# Altium PCB VM52-T2.PcbDoc (part 2 of 2)
Units mm, origin at the board's own origin, x right, y up, seen from the top; angles counter-clockwise.
Board outline 156.25 x 95.25 mm, 4 copper layers (Top Layer, Internal Plane 1, Internal Plane 2, Bottom Layer), stack 0 mm thick; 194 components, 129 nets, 738 pads, 719 vias.
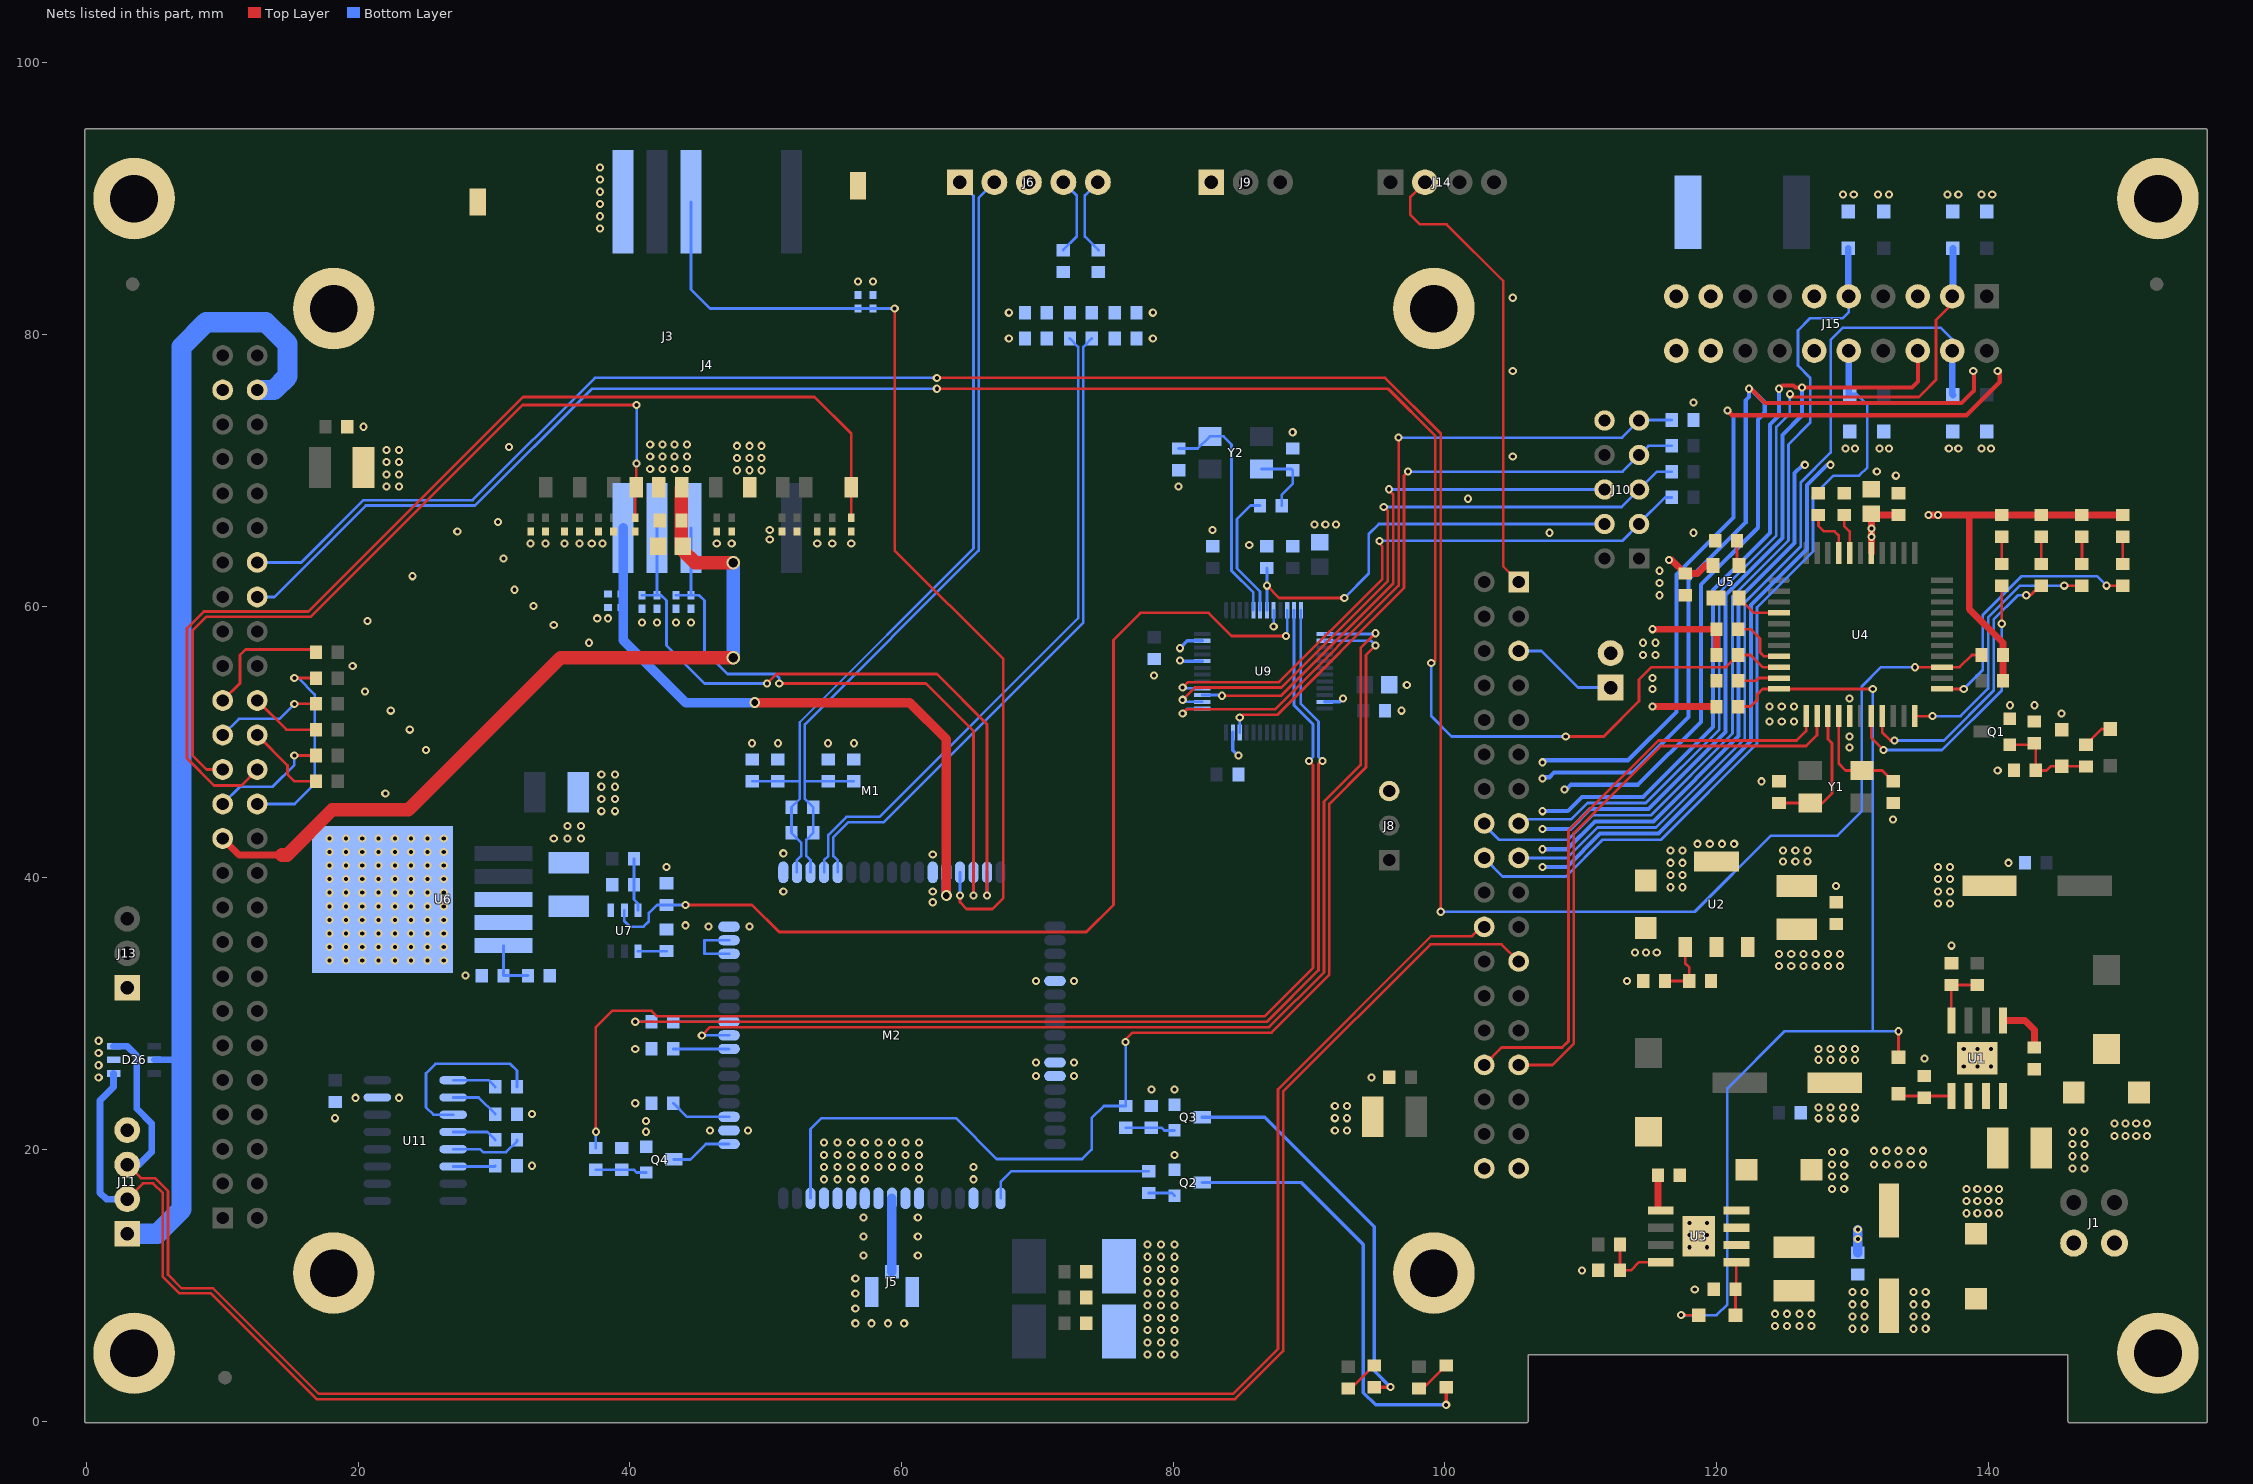
[diagram p4: the nets of this part, all layers, seen from the top]

## Via types
v1: diameter 0.6, hole 0.3, Top Layer to Bottom Layer, tented both sides, 698 vias
v2: diameter 0.8, hole 0.5, Top Layer to Bottom Layer, tented both sides, 14 vias
v3: diameter 1, hole 0.6, Top Layer to Bottom Layer, tented both sides, 5 vias
v4: diameter 1, hole 0.7, Top Layer to Bottom Layer, tented both sides, 2 vias

## Nets (pads, with @x,y where several pads share a name; then routed paths per layer and width w, separated by ;. In a path a pad name is that pad's centre, name@x,y a point inside that pad or via, vN(x,y) a via of type N, cw(c..) or ccw(c..) an arc to the next point about the centre after c; other vN are vias at no path point) (continued)
ETX_P: J14.2 M1.B1 | length 34.3
  Top Layer w0.19: J14.2@98.54,91.2 97.46,90.12 97.46,88.8 98.16,88.1 100.137,88.1 104.3,83.937 104.3,62.92 M1.B1@105.44,61.78
GND: C1.1 C2.2 C4.1 C5.1 C6.2 C7.1 C8.1 C9.2 C11.1 C12.1 C13.2 C14.1 C15.1 C16.1 C17.1 C18.2 C19.1 C20.2 C21.2 C22.2 C23.2 C24.2 C25.1 C27.2 C28.1 C29.2 C30.2 C31.1 C32.2 C33.2 C34.2 C35.2 C36.2 C37.2 C38.1 C39.1 C40.2 C43.2 C46.1 C47.1 C51.2 C52.2 C54.2 C55.2 C56.2 C57.2 C58.2 C59.2 C60.2 C61.1 C62.1 C63.1 C64.1 C65.2 C66.2 C67.2 C69.2 C71.2 C74.2 C75.2 C76.2 C77.2 D2.1 D4.1 D11.1 D14.2 D15.1 D16.1 D17.1 D18.1 D19.1 D20.1 D21.1 D22.1 D23.1 D24.1 D25.1 D26.2 D28.2 D29.2 D30.2 D31.2 D32.1 D33.1 D34.1 D35.1 J1.2 J2.2 J3. J3.3 J3.6 J4.4 J5.2 J5.3 J6.3 J8.3 J9.1 J10.10 J11.4 J13.1 J15.5 J15.6 J15.11 J15.12 M1.A49 M1.B35 M1.B36 M1.MT5 M1.MT6 M1.MT7 M1.MT8 M2.2 M2.17 M2.18 M2.29 M2.39 M2.45 M2.46 M2.54 M2.58 M2.59 M2.61 M2.62 M2.63 M2.64 M2.65 pad.MT1 pad.MT2 pad.MT3 pad.MT4 Q1.3 Q2.3 Q3.3 Q4.3 R1.2 R3.2 R4.2 R6.2 R14.2 R15.1 R17.1 R20.2 R22.1 R24.2 R25.1 R28.1 R29.1 R39.1 R44.2 R48.2 R49.1 U1.6 U1.9 U3.6 U3.9 U4.16 U5.1 U6. U6.3 U9.8 U9.23 U9.35 U9.44 U9.47 U11.15 | length 343.7
  Top Layer w0.3: v1(120.8,74.4) 121.15,74.05 138.414,74.05 140.85,76.486 140.85,77.25 140.8,77.3 v1(140.7,77.3) ; v1(122.4,76) 122.536,76 123.586,74.95 138.041,74.95 138.945,75.855 138.945,77.255 v1(138.9,77.3) ; v1(124.6,76) 124.85,76.25 125.669,76.25 125.819,76.1 v1(126.3,76.1) 134.4,76.1 134.82,76.52 J15.6@134.82,78.8
  Bottom Layer w0.2: v1(87.4,58.5) U9.8@87.4,59.7
  Bottom Layer w0.254: v1(80.5,56) 80.55,55.95 U9.44@82.15,55.95 ; v1(80.5,56.9) 81.05,57.45 U9.47@82.15,57.45 ; U9.35@84.4,50.7 84.4,49.4 v1(84.8,49) ; U9.23@91.15,52.95 92.25,52.95 v1(92.5,53.2)
  Bottom Layer w0.3: v1(107.2,40.8) 108.982,40.8 111.432,43.25 115.723,43.25 122.532,50.059 122.532,60.096 126.65,64.214 126.65,68.914 128.136,70.4 v1(128.4,70.4) ; v1(107.2,42.1) 109.009,42.1 111.059,44.15 115.35,44.15 121.632,50.432 121.632,60.532 125.75,64.65 125.75,69.8 126.35,70.4 v1(126.5,70.4) ; v1(107.2,43.6) 109.236,43.6 110.686,45.05 114.978,45.05 120.655,50.727 120.655,60.827 124.85,65.022 124.85,72.6 126.3,74.05 v1(126.3,76.1) ; v1(107.2,44.9) 109.05,44.9 110.1,45.95 114.605,45.95 119.755,51.1 119.755,61.2 123.95,65.395 123.95,73.377 124.6,74.027 v1(124.6,76) ; v1(107.2,47.3) 107.2,47.4 107.7,47.4 108.05,47.75 113.859,47.75 117.95,51.841 117.95,61.9 117.955,61.905 117.955,61.945 122.15,66.141 122.15,75.15 122.4,75.4 v1(122.4,76) 122.519,76 123.55,74.969 123.55,74.25 123.05,73.75 123.05,65.768 118.855,61.573 118.855,51.473 114.232,46.85 109.3,46.85 108.95,46.5 v1(108.8,46.5) ; v1(107.2,48.5) 107.2,48.65 113.486,48.65 117.05,52.214 117.05,62.314 121.25,66.514 121.25,73.95 v1(120.8,74.4) ; J15.12@127.2,78.8 J15.12@127.35,78.65
  other v1: 78.1,4.9 79.1,4.9 80.1,4.9 78.1,5.8 79.1,5.8 80.1,5.8 78.1,6.7 79.1,6.7 80.1,6.7 130,6.8 130.9,6.8 134.5,6.8 135.4,6.8 124.3,7 125.2,7 126.1,7 127,7 56.6,7.2 57.8,7.2 59,7.2 60.2,7.2 78.1,7.6 79.1,7.6 80.1,7.6 130,7.7 130.9,7.7 134.5,7.7 135.4,7.7 124.3,7.9 125.2,7.9 126.1,7.9 127,7.9 56.6,8.3 78.1,8.5 79.1,8.5 80.1,8.5 130,8.6 130.9,8.6 134.5,8.6 135.4,8.6 56.6,9.4 78.1,9.4 79.1,9.4 80.1,9.4 130,9.5 130.9,9.5 134.5,9.5 135.4,9.5 118.4,9.7 78.1,10.3 79.1,10.3 80.1,10.3 56.6,10.5 110.1,11.1 78.1,11.2 79.1,11.2 80.1,11.2 78.1,12.1 79.1,12.1 80.1,12.1 57.2,12.2 61.2,12.2 118,12.8 119.3,12.8 78.1,13 79.1,13 80.1,13 57.2,13.6 61.2,13.6 118,13.7 119.3,13.7 118,14.6 119.3,14.6 57.2,15 61.2,15 128.5,17.1 129.4,17.1 54.3,17.8 55.3,17.8 56.3,17.8 57.3,17.8 61.3,17.8 65.3,17.8 128.5,18 129.4,18 146.2,18.6 147.1,18.6 54.3,18.7 55.3,18.7 56.3,18.7 57.3,18.7 58.3,18.7 59.3,18.7 60.3,18.7 61.3,18.7 65.3,18.7 32.8,18.8 128.5,18.9 129.4,18.9 146.2,19.5 147.1,19.5 54.3,19.6 55.3,19.6 56.3,19.6 57.3,19.6 58.3,19.6 59.3,19.6 60.3,19.6 61.3,19.6 80.1,19.6 128.5,19.8 129.4,19.8 146.2,20.4 147.1,20.4 54.3,20.5 55.3,20.5 56.3,20.5 57.3,20.5 58.3,20.5 59.3,20.5 60.3,20.5 61.3,20.5 149.3,21 150.1,21 150.9,21 151.7,21 41.2,21.3 146.2,21.3 147.1,21.3 45.9,21.4 48.7,21.4 91.9,21.4 92.8,21.4 149.3,21.9 150.1,21.9 150.9,21.9 151.7,21.9 41.2,22.1 18.3,22.3 91.9,22.3 92.8,22.3 127.5,22.3 128.4,22.3 129.3,22.3 130.2,22.3 32.8,22.6 127.5,23.1 128.4,23.1 129.3,23.1 130.2,23.1 91.9,23.2 92.8,23.2 40.4,23.4 19.8,23.8 23,23.8 78.4,24.4 80.1,24.4 0.9,25.3 94.6,25.3 69.9,25.4 72.7,25.4 138.2,26.1 139.2,26.1 140.2,26.1 0.9,26.2 69.9,26.4 72.7,26.4 127.5,26.6 128.4,26.6 129.3,26.6 130.2,26.6 135.3,26.7 0.9,27.1 40.4,27.4 127.5,27.4 128.4,27.4 129.3,27.4 130.2,27.4 138.2,27.4 139.2,27.4 140.2,27.4 0.9,28 69.9,32.4 72.7,32.4 113.4,32.4 27.9,32.8 17.9,33.9 19.1,33.9 20.3,33.9 21.5,33.9 22.7,33.9 23.9,33.9 25.1,33.9 26.3,33.9 114,34.5 114.8,34.5 115.6,34.5 17.9,34.9 19.1,34.9 20.3,34.9 21.5,34.9 22.7,34.9 23.9,34.9 25.1,34.9 26.3,34.9 137.3,35 17.9,35.9 19.1,35.9 20.3,35.9 21.5,35.9 22.7,35.9 23.9,35.9 25.1,35.9 26.3,35.9 45.8,36.4 48.8,36.4 44.1,36.5 17.9,36.9 19.1,36.9 20.3,36.9 21.5,36.9 22.7,36.9 23.9,36.9 25.1,36.9 26.3,36.9 17.9,37.9 19.1,37.9 20.3,37.9 21.5,37.9 22.7,37.9 23.9,37.9 25.1,37.9 26.3,37.9 136.3,38.1 137.2,38.1 62.3,38.2 17.9,38.9 19.1,38.9 20.3,38.9 21.5,38.9 22.7,38.9 23.9,38.9 25.1,38.9 26.3,38.9 51.3,39 62.3,39 136.3,39 137.2,39 128.8,39.4 17.9,39.9 19.1,39.9 20.3,39.9 21.5,39.9 22.7,39.9 23.9,39.9 25.1,39.9 26.3,39.9 136.3,39.9 137.2,39.9 42.7,40.8 136.3,40.8 137.2,40.8 17.9,40.9 19.1,40.9 20.3,40.9 21.5,40.9 22.7,40.9 23.9,40.9 25.1,40.9 26.3,40.9 141.5,41.1 124.9,41.2 125.8,41.2 126.7,41.2 62.3,41.7 51.3,41.8 17.9,41.9 19.1,41.9 20.3,41.9 21.5,41.9 22.7,41.9 23.9,41.9 25.1,41.9 26.3,41.9 124.9,42 125.8,42 126.7,42 17.9,42.9 19.1,42.9 20.3,42.9 21.5,42.9 22.7,42.9 23.9,42.9 25.1,42.9 26.3,42.9 34.4,42.9 35.4,42.9 36.4,42.9 35.4,43.8 36.4,43.8 133,44.3 37.9,44.9 38.9,44.9 37.9,45.8 38.9,45.8 22,46.2 37.9,46.7 38.9,46.7 123.3,47.1 37.9,47.6 38.9,47.6 140.7,47.9 25,49.4 129.8,49.6 49,49.9 50.9,49.9 54.6,49.9 56.5,49.9 129.8,50.4 23.8,50.9 123.9,51.5 124.8,51.5 125.7,51.5 145.4,52.1 22.4,52.3 96.8,52.3 123.9,52.6 124.8,52.6 125.7,52.6 141.6,52.7 143.4,52.7 129.8,53.2 20.5,53.7 115.3,53.9 97.2,54.2 115.3,54.7 78.6,54.9 19.6,55.6 114.6,56.4 115.5,56.4 37,57.3 114.6,57.3 115.5,57.3 34.4,58.6 40.9,58.8 42,58.8 43.4,58.8 44.5,58.8 20.7,58.9 37.6,59.1 38.4,59.1 32.9,60 115.8,60.8 31.5,61.2 115.8,61.7 24,62.2 115.8,62.6 30.7,63.5 85.6,64.5 32.7,64.6 33.8,64.6 35.2,64.6 36.3,64.6 37.2,64.6 38,64.6 46.4,64.6 47.5,64.6 53.8,64.6 54.9,64.6 56.3,64.6 50.3,64.9 107.7,65.4 118.3,65.4 27.3,65.5 50.3,65.6 82.9,65.6 90.4,66 91.2,66 92,66 30.3,66.2 101.7,67.9 22.1,68.8 23,68.8 80.4,68.8 133.2,69.6 22.1,69.7 23,69.7 131.8,69.9 47.9,70 48.8,70 49.7,70 41.5,70.1 42.4,70.1 43.3,70.1 44.2,70.1 22.1,70.6 23,70.6 47.9,70.9 48.8,70.9 49.7,70.9 41.5,71 42.4,71 43.3,71 44.2,71 105,71 22.1,71.5 23,71.5 129.5,71.6 130.2,71.6 132,71.6 132.7,71.6 137.1,71.6 137.8,71.6 139.5,71.6 140.2,71.6 31.1,71.7 47.9,71.8 48.8,71.8 49.7,71.8 41.5,71.9 42.4,71.9 43.3,71.9 44.2,71.9 88.8,72.8 20.4,73.2 118.3,75 105,77.3 67.9,79.7 78.5,79.7 67.9,81.6 78.5,81.6 105,82.7 56.8,83.9 57.9,83.9 37.8,87.8 37.8,88.7 37.8,89.6 129.3,90.3 130.1,90.3 131.9,90.3 132.7,90.3 137,90.3 137.8,90.3 139.5,90.3 140.3,90.3 37.8,90.5 37.8,91.4 37.8,92.3
GSM-PK: R38.2 U9.11 | length 91
  Top Layer w0.2: v1(37.5,21.3) 37.5,29 38.7,30.2 41.6,30.2 42,29.8 86.734,29.8 90.3,33.366 90.3,48.3 v1(90,48.6)
  Bottom Layer w0.2: R38.2@37.5,20.1 v1(37.5,21.3) ; U9.11@88.9,59.7 88.9,52.7 90.3,51.3 90.3,48.9 v1(90,48.6)
GSM-PWR: R25.2 U7.5 U9.10 | length 75.3
  Top Layer w0.2: v1(44.1,38) 49,38 51,36 73.6,36 75.6,38 75.6,57.5 77.6,59.5 82.6,59.5 84.3,57.8 v1(88.3,57.8)
  Bottom Layer w0.2: U7.5@39.6,37.6 39.6,36.8 40,36.4 41,36.4 41.4,36.8 41.4,37.4 42,38 R25.2@42.7,38 v1(44.1,38) ; v1(88.3,57.8) 88.4,57.9 U9.10@88.4,59.7
GSM-RXD: R33.1 U9.12 | length 80.4
  Top Layer w0.2: v1(40.4,29.4) 86.9,29.4 90.7,33.2 90.7,48.4 90.9,48.6 v1(91,48.6)
  Bottom Layer w0.2: v1(40.4,29.4) R33.1@41.6,29.4 ; U9.12@89.4,59.7 89.4,52.8 90.7,51.5 90.7,48.9 v1(91,48.6)
GSM-TXD: M2.9 U9.13 | length 80
  Top Layer w0.2: v1(45.3,28.4) 45.9,29 87.066,29 91.1,33.034 91.1,45.6 93.8,48.3 93.8,56.9 v1(94.9,58)
  Bottom Layer w0.2: v1(45.3,28.4) M2.9@47.3,28.4 ; U9.13@91.15,57.95 94.85,57.95 v1(94.9,58)
HAND-IN: M1.A38 R12.2 U4.9 | length 145.3
  Top Layer w0.2: v1(62.6,76) 95.834,76 99.3,72.534 99.3,56 99.1,55.8 v1(99,55.8) ; v1(108.9,50.4) 111.7,50.4 114.3,53 114.3,54.6 115.2,55.5 120.7,55.5 R12.2@121.6,56.4 122.5,56.4 123.4,55.5 U4.9@124.6,55.5
  Bottom Layer w0.2: M1.A38@12.57,60.67 13.836,60.67 20.566,67.4 28.6,67.4 37.2,76 v1(62.6,76) ; v1(99,55.8) 99,51.9 100.5,50.4 v1(108.9,50.4)
HAND-OUT: M1.A40 R11.2 U4.25 | length 182.7
  Top Layer w0.2: v1(62.6,76.8) 95.6,76.8 99.7,72.7 v1(99.7,37.5) ; v1(134.6,55.5) U4.25@136.6,55.5 137.9,55.5 138.8,56.4 R11.2@139.5,56.4
  Bottom Layer w0.2: M1.A40@12.57,63.21 15.81,63.21 20.4,67.8 28.434,67.8 37.434,76.8 v1(62.6,76.8) ; v1(99.7,37.5) 118.4,37.5 124,43.1 128.9,43.1 130.7,44.9 130.7,54.1 132.1,55.5 v1(134.6,55.5)
HDD-LOCK: R14.1 U4.10 | length 3.1
  Top Layer w0.2: R14.1@121.6,54.5 122.9,54.5 123.1,54.7 U4.10@124.6,54.7
I2C-SCL: M1.B29 U4.13 | length 42.5
  Top Layer w0.2: M1.B29@105.44,26.22 107.92,26.22 109.5,27.8 109.5,43.3 115.9,49.7 126.6,49.7 127.4,50.5 U4.13@127.4,51.9
I2C-SDA: M1.B30 U4.12 | length 44.1
  Top Layer w0.2: M1.B30@102.9,26.22 104.18,27.5 108.634,27.5 109.1,27.966 109.1,43.466 115.734,50.1 125.9,50.1 126.6,50.8 U4.12@126.6,51.9
IR: R16.1 U4.8 | length 4.4
  Top Layer w0.2: R16.1@121.6,58.3 122.5,58.3 123.2,57.6 123.2,56.6 123.5,56.3 U4.8@124.6,56.3
MIC_N: C40.1 C41.2 C42.2 C43.1 J6.2 M2.20 | length 60.8
  Bottom Layer w0.19: M2.20@53.3,40.4 53.3,41.295 52.99,41.605 52.99,42.79 C42.2@53.5,43.3 C41.2@53.5,45.2 52.89,45.81 52.89,47.1 ; C43.1@56.5,47.1 C40.1@54.6,47.1 52.89,47.1 ; J6.2@66.84,91.2 65.68,90.04 65.68,64.08 52.89,51.29 52.89,47.1
MIC_P: C38.2 C39.2 C41.1 C42.1 J6.1 M2.19 | length 60.7
  Bottom Layer w0.19: C39.2@49,47.1 C38.2@50.9,47.1 52.51,47.1 ; M2.19@52.3,40.4 52.3,41.295 52.61,41.605 52.61,42.59 C42.1@51.9,43.3 C41.1@51.9,45.2 52.51,45.81 52.51,47.1 ; J6.1@64.3,91.2 65.3,90.2 65.3,64.237 52.51,51.447 52.51,47.1
NetC3_1: C3.1 D2.2 L1.1 U1.8
NetC3_2: C3.2 U1.1 | length 3.9
  Top Layer w0.5: U1.1@141.1,29.5 142.7,29.5 143.4,28.8 C3.2@143.4,27.5
NetC10_1: C10.1 D4.2 L2.1 U3.8
NetC10_2: C10.2 U3.1 | length 2.4
  Top Layer w0.5: U3.1@115.7,15.7 C10.2@115.7,18.1
NetC18_1: C18.1 D11.2 Q1.2 R19.1 R20.1 | length 7.7
  Top Layer w0.2: Q1.2@141.6,49.8 143.3,49.8 C18.1@143.4,49.9 143.5,49.8 R20.1@143.5,47.9 144.3,47.9 144.6,48.2 D11.2@145.4,48.2 R19.1@147.2,48.2
NetC20_1: C20.1 U5.3 | length 1.9
  Top Layer w0.2: C20.1@121.5,64.8 121.5,63.15 U5.3@121.65,63
NetC26_2: C26.2 R21.2 U7.6 | length 3.9
  Bottom Layer w0.2: C26.2@40.3,41.4 40.3,38.4 40.6,38.1 U7.6@40.6,37.6
NetC31_2: C31.2 R21.1 R23.2 U6.4 U7.4
NetC45_2: C45.2 J6.4 | length 5.8
  Bottom Layer w0.2: C45.2@71.9,86.2 72.9,87.2 72.9,90.22 J6.4@71.92,91.2
NetC53_2: C53.2 J6.5 | length 5.8
  Bottom Layer w0.2: J6.5@74.46,91.2 73.5,90.24 73.5,87.2 C53.2@74.5,86.2
NetC63_2: C63.2 R40.2 Y2.1 | length 5.3
  Bottom Layer w0.2: Y2.1@86.5,70.1 88.7,70.1 C63.2@88.8,70 88.8,69 88,68.2 R40.2@88,67.4
NetC68_1: C68.1 U11.1 | length 3.3
  Bottom Layer w0.2: U11.1@27,25.1 29.6,25.1 C68.1@30.1,24.6
NetC68_2: C68.2 U11.3 | length 13.1
  Bottom Layer w0.2: U11.3@27,22.56 25.54,22.56 25,23.1 25,25.6 25.7,26.3 31.2,26.3 31.7,25.8 C68.2@31.7,24.6
NetC69_1: C69.1 U11.2 | length 3.6
  Bottom Layer w0.2: U11.2@27,23.83 28.87,23.83 C69.1@30.1,22.6
NetC70_1: C70.1 U11.4 | length 3.3
  Bottom Layer w0.2: U11.4@27,21.29 29.51,21.29 C70.1@30.1,20.7
NetC70_2: C70.2 U11.5 | length 5.2
  Bottom Layer w0.2: U11.5@27,20.02 28.98,20.02 29.2,19.8 30.9,19.8 31.7,20.6 C70.2@31.7,20.7
NetC71_1: C71.1 U11.6 | length 3.1
  Bottom Layer w0.2: U11.6@27,18.75 30.05,18.75 C71.1@30.1,18.8
NetD1_1: D1.1 J1.1
NetD3_2: D3.2 R3.1 U1.5 | length 4
  Top Layer w0.2: D3.2@133.4,24.1 133.56,23.94 U1.5@137.29,23.94
NetD5_2: D5.2 R6.1 U3.5 | length 3.9
  Top Layer w0.2: D5.2@121.4,7.8 R6.1@121.4,9.7 121.46,9.76 U3.5@121.46,11.69
NetD6_1: D6.1 R7.2 | length 2
  Top Layer w0.2: D6.1@141,63.1 R7.2@141,65.1
NetD7_1: D7.1 R8.2 | length 2
  Top Layer w0.2: D7.1@143.9,63.1 R8.2@143.9,65.1
NetD8_1: D8.1 R9.2 | length 2
  Top Layer w0.2: D8.1@146.9,63.1 R9.2@146.9,65.1
NetD9_1: D9.1 R10.2 | length 2
  Top Layer w0.2: D9.1@149.9,63.1 R10.2@149.9,65.1
NetD10_2: D10.2 R19.2 | length 2.3
  Top Layer w0.2: R19.2@147.2,49.8 148.35,50.95 D10.2@149,50.95
NetD12_1: D12.1 R26.2 | length 2.7
  Top Layer w0.2: R26.2@98.1,2.4 98.4,2.4 D12.1@100.1,4.1
NetD12_2: D12.2 Q2.1 | length 32.4
  Top Layer w0.254: v1(100.1,1.2) D12.2@100.1,2.5
  Bottom Layer w0.254: Q2.1@82.132,17.565 89.435,17.565 94,13 94,2.1 94.9,1.2 v1(100.1,1.2)
NetD13_1: D13.1 R30.2 | length 2.6
  Top Layer w0.2: R30.2@92.9,2.4 93.1,2.4 D13.1@94.8,4.1
NetD13_2: D13.2 Q3.1 | length 29.5
  Top Layer w0.254: D13.2@94.8,2.5 v1(96,2.5)
  Bottom Layer w0.254: Q3.1@82.132,22.365 86.735,22.365 94.8,14.3 94.8,3.7 v1(96,2.5)
NetF1_2: F1.2 J15.17 J15.18 J15.19 J15.20
NetM2_3: M2.3 R28.2 | length 4.5
  Bottom Layer w0.2: R28.2@43.2,23.4 44.2,22.4 M2.3@47.3,22.4
NetM2_8: M2.8 R29.2 | length 4.1
  Bottom Layer w0.2: R29.2@43.2,27.4 M2.8@47.3,27.4
NetM2_10: M2.10 R33.2 | length 4.1
  Bottom Layer w0.2: R33.2@43.2,29.4 M2.10@47.3,29.4
NetM2_15: M2.15 M2.16 | length 4.6
  Bottom Layer w0.2: M2.15@47.3,34.4 45.5,34.4 45.5,35.4 M2.16@47.3,35.4
NetQ2_2: Q2.2 R27.1 | length 2
  Bottom Layer w0.2: R27.1@78.2,16.8 79.9,16.8 Q2.2@80.1,16.6
NetQ3_2: Q3.2 R36.1 R49.2 | length 3.7
  Bottom Layer w0.2: R36.1@76.5,21.6 R49.2@78.4,21.6 79.15,21.6 79.35,21.4 Q3.2@80.1,21.4
NetQ4_2: Q4.2 R38.1 R39.2 | length 3.8
  Bottom Layer w0.2: R38.1@37.5,18.5 40.3,18.5 40.5,18.3 Q4.2@41.2,18.3
NetR1_1: R1.1 R2.1 U1.4 | length 4.5
  Top Layer w0.2: U1.4@137.29,29.5 137.29,32.09 R1.1@137.3,32.1 R2.1@139.2,32.1
NetR4_1: R4.1 R5.1 U3.4 | length 5.2
  Top Layer w0.2: R5.1@112.9,13 R4.1@112.9,11.1 113.7,11.1 114.3,11.7 115.89,11.7 U3.4@115.9,11.69
NetR15_2: R15.2 U4.40 | length 3
  Top Layer w0.2: R15.2@129.4,66.7 129.4,65.9 129.8,65.5 U4.40@129.8,63.9
NetR17_2: R17.2 U4.41 | length 3.9
  Top Layer w0.2: R17.2@127.5,66.7 127.5,65.9 127.9,65.5 128.7,65.5 129,65.2 U4.41@129,63.9
NetR22_2: R22.2 U7.1 | length 2.1
  Bottom Layer w0.2: U7.1@40.6,34.6 R22.2@42.7,34.6
NetR23_1: R23.1 R24.1 U6.5 | length 4
  Bottom Layer w0.2: U6.5@30.7,35 R24.1@30.7,32.8 R23.1@32.5,32.8
NetR47_2: R47.2 R48.1 U2.1 | length 4.4
  Top Layer w0.2: R48.1@116.2,32.4 R47.2@118,32.4 118,33.4 117.7,33.7 U2.1@117.7,34.9
NLIGHT: M2.52 R27.2 | length 12.4
  Bottom Layer w0.2: M2.52@67.3,16.4 67.3,17.6 68.1,18.4 R27.2@78.2,18.4
NRST: C62.2 J10.4 U9.7 | length 32.5
  Top Layer w0.2: v1@86.9,61.7 v1(86.9,61.5) 87.8,60.6 v1(92.6,60.6)
  Bottom Layer w0.2: U9.7@86.9,59.7 86.9,60.8 v1(86.9,61.5) C62.2@86.9,62.8 ; v1(92.6,60.6) 94.4,62.4 94.4,65.3 95.14,66.04 J10.4@111.76,66.04
OSC-IN: C61.2 U9.5 Y2.2 | length 17.4
  Bottom Layer w0.2: C61.2@80.4,71.6 81.8,71.6 Y2.2@82.7,72.5 83.7,72.5 84.3,71.9 84.3,62.6 85.9,61 U9.5@85.9,59.7
OSC-OUT: R40.1 U9.6 | length 9.5
  Bottom Layer w0.2: U9.6@86.4,59.7 86.4,61.066 84.7,62.766 84.7,66.4 85.7,67.4 R40.1@86.4,67.4
OTG_N: D26.1 J11.2 M1.B23 | length 150.6
  Top Layer w0.19: J11.2@3,16.87 J11.2@3,16.34 4.16,17.5 4.9,17.5 5.62,16.78 5.62,10.623 6.843,9.4 9.163,9.4 16.943,1.62 84.557,1.62 88.1,5.163 88.1,24.263 98.937,35.1 104.18,35.1 M1.B23@105.44,33.84
  Bottom Layer w0.5: D26.1@2,25.6 2,24.6 1,23.6 1,16.8 1.46,16.34 J11.2@3,16.34
OTG_P: D26.3 J11.3 M1.B22 | length 147.7
  Top Layer w0.19: J11.3@3,18.88 4,17.88 5.057,17.88 6,16.937 6,10.78 7,9.78 9.32,9.78 17.1,2 84.4,2 87.72,5.32 87.72,24.42 99,35.7 102,35.7 102.68,36.38 M1.B22@102.9,36.38
  Bottom Layer w0.19: J11.3@3,18.88 J11.3@3.88,18.88
  Bottom Layer w0.5: D26.3@2,27.6 3,27.6 3.7,26.9 3.7,25.3 3.7,23 4.8,21.9 4.8,19.8 J11.3@3.88,18.88
PWR-EN: D3.1 D5.1 R13.1 U4.11 | length 73
  Top Layer w0.2: v1(117.4,7.8) D5.1@118.7,7.8 ; R13.1@121.6,52.6 122.5,52.6 123,53.1 123,53.5 123.4,53.9 U4.11@124.6,53.9 v1(131.5,53.9) ; D3.1@133.4,26.8 v1(133.4,28.7)
  Bottom Layer w0.2: v1(117.4,7.8) 120,7.8 120.8,8.6 120.8,24.5 125,28.7 131.5,28.7 ; v1(131.5,53.9) 131.5,28.7 ; v1(133.4,28.7) 131.5,28.7
PWR-LED: D9.2 U4.23 | length 19.4
  Top Layer w0.2: U4.23@136.6,53.9 v1(138.2,53.9) ; v1(148.7,61.5) D9.2@149.9,61.5
  Bottom Layer w0.2: v1(138.2,53.9) 139.6,55.3 139.6,59.331 142.469,62.2 148,62.2 v1(148.7,61.5)
PWRKEY: M2.1 Q4.1 | length 4.5
  Bottom Layer w0.2: Q4.1@43.232,19.265 44.465,19.265 45.6,20.4 M2.1@47.3,20.4
REC-LED: D7.2 U4.19 | length 20.9
  Top Layer w0.2: U4.19@132.2,51.9 132.2,50.7 132.8,50.1 v1(133.1,50.1) ; v1(142.8,60.8) 143.1,60.8 143.8,61.5 D7.2@143.9,61.5
  Bottom Layer w0.2: v1(133.1,50.1) 136.734,50.1 140.4,53.766 140.4,59 142.2,60.8 v1(142.8,60.8)
RFANT: J5.1 M2.60 | length 5.4
  Bottom Layer w0.7: J5.1@59.3,11 M2.60@59.3,16.4
RST: U4.4 U5.2 | length 3.4
  Top Layer w0.2: U5.2@121.65,60.6 122.75,59.5 U4.4@124.6,59.5
RUN-LED: D8.2 U4.22 | length 19.3
  Top Layer w0.2: U4.22@134.6,51.9 v1(135.9,51.9) ; v1(145.6,61.5) D8.2@146.9,61.5
  Bottom Layer w0.2: v1(135.9,51.9) 137.969,51.9 140,53.931 140,59.166 142.334,61.5 v1(145.6,61.5)
SD-CARDIN: D14.1 J3.10 M1.A27 | length 59.7
  Top Layer w0.2: M1.A27@10.03,47.97 8.83,47.97 7.8,49 7.8,58.2 8.808,59.208 16.508,59.208 32.1,74.8 v1(40.5,74.8) ; D14.1@40.4,66.5 J3.10@40.4,68.68 ; J3.10@40.47,68.75 40.47,70.47 v1(40.5,70.5)
  Bottom Layer w0.2: v1(40.5,70.5) v1(40.5,74.8)
SD-CLK: M1.A31 R50.1 | length 9.7
  Top Layer w0.2: M1.A31@10.05,53.05 M1.A31@10.03,53.05 11.3,54.32 11.3,56.4 11.7,56.8 16.7,56.8 R50.1@16.9,56.6
SD-CMD: M1.A32 R46.1 | length 5.2
  Top Layer w0.2: M1.A32@12.57,53.05 14.72,50.9 R46.1@16.9,50.9
SD-DAT0: M1.A25 R51.1 | length 8.8
  Top Layer w0.2: v1(15.3,49) R51.1@16.9,49
  Bottom Layer w0.2: M1.A25@10.03,45.43 11.3,46.7 13.7,46.7 15.3,48.3 v1(15.3,49)
SD-DAT1: M1.A30 R52.1 | length 6.1
  Top Layer w0.2: M1.A30@12.57,50.51 14.8,48.28 14.8,47.6 15.3,47.1 R52.1@16.9,47.1
SD-DAT2: M1.A26 R53.1 | length 15
  Top Layer w0.2: v1(15.3,54.7) R53.1@16.9,54.7
  Bottom Layer w0.2: M1.A26@12.57,45.43 15.33,45.43 16.8,46.9 16.8,53.5 15.6,54.7 v1(15.3,54.7)
SD-DAT3: M1.A29 R45.1 | length 8
  Top Layer w0.2: M1.A29@10.03,50.51 M1.A29@10.21,50.51 ; v1(15.3,52.8) R45.1@16.9,52.8
  Bottom Layer w0.2: M1.A29@10.03,50.51 11.22,51.7 14.2,51.7 v1(15.3,52.8)
SD-LED: D6.2 U4.18 | length 21.1
  Top Layer w0.2: U4.18@131.4,51.9 131.4,50.3 v1(132.3,49.4) ; v1(141,58.7) D6.2@141,61.5
  Bottom Layer w0.2: v1(132.3,49.4) 136.6,49.4 141,53.8 v1(141,58.7)
SD-WP: D15.2 J3.11 M1.A28 | length 79.3
  Top Layer w0.2: M1.A28@12.57,47.97 11.4,46.8 9.4,46.8 7.4,48.8 7.4,58.366 8.642,59.608 16.342,59.608 32.134,75.4 53.6,75.4 56.3,72.7 J3.11@56.3,68.75 D15.2@56.3,66.5
SIMCLK: C29.1 D23.2 J4.3 M2.32 | length 47.2
  Top Layer w0.2: v1(51,54.3) 61.8,54.3 65.3,50.8 v1(65.3,38.7)
  Bottom Layer w0.2: C29.1@43.4,60.8 D23.2@44.5,60.8 ; J4.3@44.5,65.75 D23.2@44.5,60.8 ; v1(51,54.3) 51,54.7 50.7,55 47.2,55 45.5,56.7 45.5,60.4 45.1,60.8 D23.2@44.5,60.8 ; v1(65.3,38.7) M2.32@65.3,40.4
SIMDATA: C27.1 D22.2 J4.6 M2.31 | length 74.7
  Top Layer w0.2: v1(59.5,81.9) 59.5,64.1 67.5,56.1 67.5,38.5 66.7,37.7 64.8,37.7 64.3,38.2 v1(64.3,38.7)
  Bottom Layer w0.2: J4.6@44.5,89.75 44.5,83.3 45.9,81.9 C27.1@56.8,81.9 D22.2@57.9,81.9 v1(59.5,81.9) ; v1(64.3,38.7) M2.31@64.3,40.4
SIMRST: C30.1 D24.2 J4.2 M2.33 | length 51.1
  Top Layer w0.2: v1(50.1,54.3) 50.8,55 62.6,55 66.3,51.3 v1(66.3,38.7)
  Bottom Layer w0.2: C30.1@40.9,60.8 D24.2@42,60.8 ; J4.2@42,65.75 D24.2@42,60.8 ; v1(50.1,54.3) 45.5,54.3 42.7,57.1 42.7,60.4 42.3,60.8 D24.2@42,60.8 ; v1(66.3,38.7) M2.33@66.3,40.4
SIMVCC: C32.1 D25.2 J4.1 M2.30 | length 48.3
  Top Layer w0.7: v2(49.2,52.9) 60.6,52.9 63.3,50.2 v2(63.3,38.7)
  Bottom Layer w0.7: J4.1@39.5,65.75 39.5,57.5 44.1,52.9 v2(49.2,52.9) ; v2(63.3,38.7) M2.30@63.3,40.4
SPK_N: C48.2 C49.2 C51.1 C52.1 C53.1 M2.22 | length 48.8
  Bottom Layer w0.19: M2.22@55.3,40.4 55.3,41.295 54.99,41.605 54.99,42.99 56.1,44.1 58.7,44.1 73.39,58.79 73.39,79.09 C49.2@74,79.7
SPK_P: C45.1 C46.2 C47.2 C48.1 C49.1 M2.21 | length 48.7
  Bottom Layer w0.19: M2.21@54.3,40.4 54.3,41.295 54.61,41.605 54.61,43.147 55.943,44.48 58.385,44.48 73.01,59.105 73.01,79.09 C49.1@72.4,79.7
STATUS: M2.66 R36.2 U9.14 | length 84.5
  Top Layer w0.2: v1(76.5,27.9) 76.5,28.1 77,28.6 87.231,28.6 91.5,32.869 91.5,45.434 94.2,48.134 94.2,56.4 v1(94.9,57.1)
  Bottom Layer w0.2: M2.66@53.3,16.4 53.3,21.5 54.1,22.3 64,22.3 67,19.3 73.3,19.3 74,20 74,22.3 74.9,23.2 R36.2@76.5,23.2 v1(76.5,27.9) ; U9.14@91.15,57.4 U9.14@91.15,57.45 94.55,57.45 v1(94.9,57.1) v1@94.7,57.1
TCK: J10.9 R44.1 U9.37 | length 52.9
  Top Layer w0.2: v1(80.7,52.1) 81,52.4 87.5,52.4 96.6,61.5 v1(96.6,72.4)
  Bottom Layer w0.2: v1(80.7,52.1) 81.05,52.45 U9.37@82.15,52.45 ; v1(96.6,72.4) 113.04,72.4 J10.9@114.3,73.66 114.34,73.7 R44.1@116.7,73.7
TDI: J10.5 R42.2 U9.38 | length 48.4
  Top Layer w0.2: v1(80.7,53.1) 81.6,54 87.969,54 95.8,61.831 95.8,67 v1(95.5,67.3)
  Bottom Layer w0.2: v1@80.8,53.2 80.7,53.3 v1(80.7,53.1) 80.85,52.95 U9.38@82.15,52.95 ; v1(95.5,67.3) 113.02,67.3 J10.5@114.3,68.58 115.62,69.9 R42.2@116.7,69.9
TDO: J10.6 U9.39 | length 40.4
  Top Layer w0.2: v1(83.6,53.4) 87.934,53.4 96.2,61.666 96.2,68.2 95.9,68.5 v1(95.9,68.6)
  Bottom Layer w0.2: U9.39@82.15,53.45 83.55,53.45 v1(83.6,53.4) ; v1(95.9,68.6) 95.92,68.58 J10.6@111.76,68.58
TMS: J10.7 R41.2 U9.34 | length 46
  Top Layer w0.2: v1(84.9,51.8) 85.1,52 87.666,52 97,61.334 97,69.6 v1(97.3,69.9)
  Bottom Layer w0.2: U9.34@84.9,50.7 v1(84.9,51.8) ; v1(97.3,69.9) 113.08,69.9 J10.7@114.3,71.12 114.98,71.8 R41.2@116.7,71.8
TRST: J10.3 R43.2 U9.40 | length 45.2
  Top Layer w0.2: v1(80.7,54) 81.1,54.4 87.803,54.4 95.4,61.997 95.4,64.4 95.2,64.6 v1(95.2,64.8)
  Bottom Layer w0.2: v1(80.7,54) 80.75,53.95 U9.40@82.15,53.95 ; v1(95.2,64.8) 113.06,64.8 J10.3@114.3,66.04 114.3,66.1 116.2,68 R43.2@116.7,68
V3.3-MCU: C7.2 C14.2 C15.2 C16.2 R7.1 R8.1 R9.1 R10.1 R11.1 R12.1 R13.2 R16.2 R18.1 R47.1 U2.2 U4.38 U5.4 | length 47.7
  Top Layer w0.5: v1(115.3,52.6) R13.2@120,52.6 ; v1(115.3,58.3) R16.2@120,58.3 R12.1@120,56.4 ; v1(116.5,63.4) 116.7,63.4 C16.2@117.7,62.4 118.6,62.4 119.2,63 U5.4@119.75,63 ; U4.38@131.4,63.9 v1(131.4,65.1) v1(131.4,65.7) C15.2@131.4,66.8 131.5,66.7 C14.2@133.4,66.7 ; v1(135.6,66.7) 138.6,66.7 ; R18.1@141.1,54.5 R11.1@141.1,56.4 141.1,57.3 138.6,59.8 138.6,66.7 ; R10.1@149.9,66.7 R9.1@146.9,66.7 R8.1@143.9,66.7 R7.1@141,66.7 138.6,66.7
  other v1: 116.6,39.3 117.5,39.3 116.6,40.2 117.5,40.2 116.6,41.1 117.5,41.1 116.6,42 117.5,42 118.6,42.5 119.5,42.5 120.4,42.5 121.3,42.5 136.3,66.7
V3.3-SD: C25.2 C64.2 J3.4 M1.A23 | length 59.9
  Top Layer w0.5: M1.A23@10.03,42.89 11.242,41.678 14.378,41.678
  Top Layer w1: 14.378,41.678 14.778,41.678 18.1,45 23.7,45 34.9,56.2 v4(47.6,56.2) ; J3.4@43.83,68.75 43.8,68.72 C25.2@43.8,66.3 43.8,64.5 C64.2@43.9,64.4 43.9,64.1 44.8,63.2 v4(47.6,63.2)
  Bottom Layer w1: v4(47.6,56.2) v4(47.6,63.2)
VBUS: D26.5 J11.1 M1.A50 | length 83.8
  Bottom Layer w0.5: D26.5@5,26.6 6.3,26.6
  Bottom Layer w1.5: J11.1@3,13.8 5.2,13.8 7,15.6 7,79.1 8.8,80.9 13.2,80.9 14.8,79.3 14.8,76.9 13.81,75.91 M1.A50@12.57,75.91
VIDEO-IN1: D29.1 J15.3 M1.B15 | length 66
  Top Layer w0.2: v1(125.4,75.6) 125.6,75.4 134.9,75.4 135.2,75.7 ; 135.2,75.7 136.16,76.66 136.16,81.06 137.36,82.26 J15.3@137.36,82.8
  Bottom Layer w0.2: M1.B15@105.44,44 105.74,44.3 109.3,44.3 110.5,45.5 114.791,45.5 120.205,50.913 120.205,61.013 124.4,65.209 124.4,73.191 125.4,74.191 v1(125.4,75.6)
  Bottom Layer w0.5: J15.3@137.4,82.84 D29.1@137.4,86.35
VIDEO-IN2: D32.2 J15.9 M1.B16 | length 63.5
  Bottom Layer w0.2: M1.B16@102.9,44 102.9,43.9 104,42.8 109.073,42.8 110.873,44.6 115.164,44.6 121.182,50.618 121.182,60.718 125.3,64.836 125.3,71.9 126.9,73.5 126.9,76.8 126,77.7 126,80.3 126.9,81.2 129.3,81.2 129.74,81.64 J15.9@129.74,82.8
  Bottom Layer w0.5: D32.2@129.7,86.35 129.7,82.84 J15.9@129.74,82.8
VIDEO-IN3: D31.1 J15.4 M1.B17 | length 66
  Bottom Layer w0.2: M1.B17@105.44,41.46 109.006,41.46 111.246,43.7 115.537,43.7 122.082,50.245 122.082,60.282 126.2,64.4 126.2,69.1 128.4,71.3 128.4,79.6 129.3,80.5 136.5,80.5 137.36,79.64 J15.4@137.36,78.8
  Bottom Layer w0.5: J15.4@137.36,78.8 137.36,75.59 D31.1@137.4,75.55
VIDEO-IN4: D34.2 J15.10 M1.B18 | length 59
  Bottom Layer w0.2: M1.B18@102.9,41.46 104.26,40.1 108.918,40.1 111.618,42.8 115.91,42.8 122.982,49.872 122.982,59.909 127.1,64.027 127.1,68.1 128.6,69.6 130.5,69.6 131.1,70.2 131.1,74.8 130.29,75.61 D34.2@129.74,75.61
  Bottom Layer w0.5: D34.2@129.74,75.61 J15.10@129.74,78.8
VIDEO-OUT: J2.1 M1.B5 | length 7.9
  Bottom Layer w0.2: M1.B5@105.44,56.7 107.1,56.7 109.8,54 J2.1@112.2,54
VIN: C1.2 C2.1 C4.2 C8.2 C9.1 C11.2 D1.2 U1.7 U2.3 U3.7 | length 1.7
  Bottom Layer w0.7: C1.2@130.4,12.4 v1(130.4,14.1)
  other v1: 130.4,13.4 138.4,15.3 139.2,15.3 140,15.3 140.8,15.3 138.4,16.2 139.2,16.2 140,16.2 140.8,16.2 138.4,17.1 139.2,17.1 140,17.1 140.8,17.1 131.6,18.9 132.5,18.9 133.4,18.9 134.3,18.9 135.2,18.9 131.6,19.9 132.5,19.9 133.4,19.9 134.3,19.9 135.2,19.9 124.6,33.5 125.5,33.5 126.4,33.5 127.3,33.5 128.2,33.5 129.1,33.5 124.6,34.4 125.5,34.4 126.4,34.4 127.3,34.4 128.2,34.4 129.1,34.4
X1: C17.2 U4.15 Y1.2 | length 8
  Top Layer w0.2: U4.15@129,51.9 129,48.4 129.5,47.9 Y1.2@130.7,47.9 132.2,47.9 C17.2@133,47.1
X2: C19.2 U4.14 Y1.1 | length 10
  Top Layer w0.2: C19.2@124.6,45.5 Y1.1@126.9,45.5 127.8,45.5 128.5,46.2 128.5,49.9 128.2,50.2 U4.14@128.2,51.9
pads on no net: D26.4 D26.6 Designator32. Designator33. Designator34. Designator35. Designator36. Designator37. J1.3 J4. J4.5 J10.8 J15.13 J15.14 J15.15 J15.16 M1.A1 M1.A2 M1.A3 M1.A5 M1.A7 M1.A8 M1.A9 M1.A10 M1.A11 M1.A12 M1.A13 M1.A14 M1.A15 M1.A16 M1.A17 M1.A18 M1.A19 M1.A20 M1.A21 M1.A22 M1.A24 M1.A33 M1.A34 M1.A35 M1.A36 M1.A37 M1.A39 M1.A47 M1.A48 M1.B6 M1.B7 M1.B8 M1.B9 M1.B10 M1.B19 M1.B20 M1.B21 M1.B24 M1.B25 M1.B26 M1.B27 M1.B28 M2.4 M2.5 M2.6 M2.7 M2.11 M2.12 M2.13 M2.14 M2.23 M2.24 M2.25 M2.26 M2.27 M2.28 M2.34 M2.35 M2.36 M2.37 M2.38 M2.40 M2.41 M2.42 M2.43 M2.44 M2.47 M2.48 M2.49 M2.50 M2.51 M2.53 M2.67 M2.68 U1.2 U1.3 U3.2 U3.3 U4.1 U4.2 U4.3 U4.5 U4.6 U4.7 U4.17 U4.20 U4.21 U4.26 U4.27 U4.28 U4.29 U4.30 U4.31 U4.32 U4.33 U4.34 U4.35 U4.36 U4.37 U4.39 U4.42 U4.43 U4.44 U9.2 U9.3 U9.4 U9.15 U9.16 U9.17 U9.18 U9.19 U9.20 U9.25 U9.26 U9.27 U9.28 U9.29 U9.32 U9.33 U9.41 U9.42 U9.43 U9.45 U9.46 U11.7 U11.8 U11.9 U11.10 Y1. Y2.

## Polygon pours and split planes (outlines as drawn)
GND on Top Layer "Bottom Layer-No Net" (solid, remove dead copper, pour order 26): 0,0 156.138,0 156.138,95.058 156.097,95.098 156.049,95.049 -0.118,95.049
NetD1_1 on Top Layer "Bottom Layer-No Net" (solid, remove dead copper, pour order 24): 138.3,10.4 142,10.4 143.3,10.4 143.9,11 143.9,14 144.2,14.3 147.3,14.3 147.6,14 147.6,7.8 146.9,7.1 137.6,7.1 137.3,7.4 137.3,10.1 137.6,10.4
+5V on Top Layer "Top Layer-No Net" (solid, remove dead copper, pour order 32): 11.9,64.6 14.1,64.6 15.1,64.6 18.3,67.8 18.3,73.8 18,74.1 15.8,74.1 13.9,72.2 13.7,72 12.3,72 8.8,72 8.5,71.7 8.5,64.9 8.8,64.6
VIN on Top Layer "Top Layer-No Net" (solid, remove dead copper, pour order 22): 142.2,21.9 142,22.1 141.5,22.1 140.7,22.1 140.5,22.3 140.4,22.4 140.4,25 140.3,25.1 139.5,25.1 139.4,25 139.4,22 139,21.6 138.1,20.7 137,20.7 131.1,20.7 130.7,20.3 130.6,20.2 130.6,16.4 130.1,15.9 129.3,15.1 129,14.8 127.4,14.8 120.6,14.8 120.4,14.6 120.4,14 120.6,13.8 123.4,13.8 123.7,13.5 123.7,11.8 124,11.5 124.2,11.5 131,11.5 141.1,11.5 141.4,11.8 141.4,16.7 142.2,17.5
NetC10_1 on Top Layer "Top Layer-No Net" (solid, remove dead copper, pour order 23): 121.2,15.1 120.6,15.1 120.4,15.3 120.2,15.5 120,15.7 117.7,15.7 117.5,15.7 116.9,16.3 116.6,16.6 116.6,17 116.6,18.1 116.6,18.8 116,19.4 115.9,19.5 114.9,19.5 111.4,19.5 111.1,19.8 111.1,23.7 111.4,24 116.3,24 119.3,21 120.6,21 124.1,21 124.4,20.7 124.4,15.4 124.1,15.1
+3.3V on Top Layer "Top Layer-No Net" (solid, remove dead copper, pour order 25): 114,29.5 121.9,29.5 124.1,29.5 124.4,29.2 124.4,21.8 124.1,21.5 119.5,21.5 119,22 116.5,24.5 113.9,24.5 111.4,24.5 111.1,24.8 111.1,29.2 111.4,29.5
VIN on Top Layer "Top Layer-No Net" (solid, remove dead copper, pour order 26): 125.3,37.3 130.1,37.3 130.3,37.3 130.6,37 130.6,33.1 130.3,32.8 121.9,32.8 121.6,33.1 121.6,34.089 121.6,37 121.9,37.3
V3.3-MCU on Top Layer "Top Layer-No Net" (solid, remove dead copper, pour order 27): 119.6,31.4 120.5,31.4 120.8,31.4 121.1,31.7 121.1,37.2 121.8,37.9 122.2,38.3 122.2,40.2 122.2,41.9 122.2,42.7 121.9,43 113.5,43 113.2,42.7 113.2,38.7 113.5,38.4 118.4,38.4 118.6,38.4 118.9,38.1 118.9,31.7 119.2,31.4
NetC3_1 on Top Layer "Top Layer-No Net" (solid, remove dead copper, pour order 28): 141.5,22.6 140.9,22.6 140.7,22.8 140.7,24.9 140.8,25 140.9,25 141.4,25 141.6,25 141.9,25 142.2,25.3 142.2,26.4 142.5,26.7 144.8,26.7 146.9,28.8 147.1,29 148.2,29 150.2,29 150.5,28.7 150.5,26.3 149.5,25.3 149.5,23.9 149.5,22.8 149.3,22.6
+5V on Top Layer "Top Layer-No Net" (solid, remove dead copper, pour order 30): 146.5,42.5 152,42.5 152.4,42.5 152.7,42.2 152.7,31.3 152.4,31 144.6,31 144.3,31.3 144.3,42.2 144.6,42.5
+3.3V on Top Layer "Top Layer-No Net" (solid, remove dead copper, pour order 33): 97.6,26.5 98.9,26.5 99.3,26.5 100.9,24.9 101,24.8 102.5,24.8 106.9,24.8 107.3,24.4 107.3,20.4 106.9,20 97.2,20 96.8,20.4 96.8,26.1 97.2,26.5
GND on Bottom Layer "Bottom Layer-No Net" (solid, remove dead copper, pour order 28): 0,0 156.138,0 156.112,0.026 156.112,95.049 -0.118,95.049
SPK_N on Bottom Layer "Bottom Layer-No Net" (solid, pour order 24): 74.2,85.3 75.2,85.3 75.4,85.3 75.6,85.1 75.6,83.1 75.6,83 76.4,82.2 76.4,81.6 76.4,80.1 76.4,79.3 76.2,79.1 73.6,79.1 73.4,79.3 73.4,85.1 73.6,85.3
SPK_P on Bottom Layer "Bottom Layer-No Net" (solid, pour order 21): 71.2,85.3 72.3,85.3 72.8,85.3 73,85.1 73,79.3 72.8,79.1 70.2,79.1 70,79.3 70,82.2 70.8,83 70.8,84.1 70.8,85.1 71,85.3
ACC on Bottom Layer "Top Layer-No Net" (solid, remove dead copper, pour order 19): 124.7,92.4 127.3,92.4 127.5,92.4 127.8,92.1 127.8,85.9 127.5,85.6 123.1,85.6 122.8,85.9 122.8,92.1 123.1,92.4
+4V on Bottom Layer "Top Layer-No Net" (solid, remove dead copper, pour order 29): 62.4,17.7 63.6,17.7 64.5,17.7 64.7,17.5 64.7,16.3 64.7,14.4 65,14.1 71,14.1 71.3,13.8 71.3,4.2 71,3.9 69.6,3.9 69.5,3.9 63,3.9 62.2,3.9 61.9,4.2 61.9,17.5 62.1,17.7
NetF1_2 on Bottom Layer "Top Layer-No Net" (solid, remove dead copper, pour order 31): 117.6,77.5 119.3,77.5 120.4,77.5 120.8,77.9 120.8,92.1 120.5,92.4 116,92.4 115.7,92.1 115.7,77.8 116,77.5
+5V on Bottom Layer "Top Layer-No Net" (solid, remove dead copper, pour order 34): 30.4,39.4 32.5,39.4 32.7,39.4 32.9,39.4 33.1,39.6 33.1,42.8 34.2,43.9 34.2,48.9 34,49.1 31.6,49.1 29,49.1 28.4,49.1 28.2,48.9 28.2,39.6 28.4,39.4
NetC31_2 on Bottom Layer "Top Layer-No Net" (solid, remove dead copper, pour order 35): 32,37.4 32.8,37.4 33,37.4 33.4,37.8 33.4,38.8 33.8,39.2 33.9,39.3 36,39.3 36.9,39.3 37.9,40.3 38.6,40.3 39.3,40.3 39.4,40.2 39.4,39.9 39.4,38.8 39.1,38.5 39.1,37.8 39.1,36.8 38.3,36 36.4,36 35.5,35.1 35.2,34.8 35.2,32.7 35.2,32.4 35,32.2 34.2,32.2 33.6,32.2 33.4,32.4 33.4,35.5 32.9,36 30.2,36 28.5,36 28.3,36.2 28.3,37 28.3,37.2 28.5,37.4
+4V on Bottom Layer "Top Layer-No Net" (solid, remove dead copper, pour order 36): 38.6,35.5 39.7,35.5 40,35.2 40,30.3 39.8,30.1 36.9,30.1 35.9,30.1 35.7,30.3 35.7,34.6 36.1,35 36.6,35.5 37.5,35.5
GND on Internal Plane 1 (split plane): 155.617,0.383 146.383,0.383 146.383,4.873 146.373,4.973 146.344,5.068 146.297,5.157 146.234,5.234 146.156,5.297 146.068,5.345 145.972,5.374 145.873,5.383 106.127,5.383 106.028,5.374 105.932,5.345 105.844,5.297 105.766,5.234 105.703,5.157 105.656,5.068 105.627,4.973 105.617,4.873 105.617,0.383 0.383,0.383 0.383,94.617 155.617,94.617
ACC on Internal Plane 2 (split plane): 155.617,13.756 146.129,13.756 146.129,30.248 152,30.248 152.065,30.256 152.126,30.282 152.178,30.322 152.218,30.374 152.244,30.435 152.252,30.5 152.252,75.7 152.244,75.765 152.218,75.826 152.178,75.878 143.978,84.078 143.926,84.118 143.865,84.144 143.8,84.152 121.952,84.152 121.952,94.617 155.617,94.617
V3.3-MCU on Internal Plane 2 (split plane): 136.871,38.252 123.5,38.252 123.435,38.244 123.374,38.218 123.322,38.178 123.282,38.126 123.256,38.065 123.248,38 123.248,31.629 110.629,31.629 110.629,67.171 136.871,67.171
VIN on Internal Plane 2 (split plane): 136.748,30.5 136.756,30.435 136.782,30.374 136.822,30.322 136.874,30.282 136.935,30.256 137,30.248 145.616,30.248 145.616,13.5 145.625,13.434 145.651,13.372 145.691,13.319 145.744,13.278 145.806,13.253 145.873,13.244 155.617,13.244 155.617,0.383 146.383,0.383 146.383,4.873 146.373,4.973 146.344,5.068 146.297,5.157 146.234,5.234 146.156,5.297 146.068,5.345 145.972,5.374 145.873,5.383 128.252,5.383 128.252,31.5 128.244,31.565 128.218,31.626 128.178,31.678 128.126,31.718 128.065,31.744 128,31.752 123.752,31.752 123.752,37.748 136.748,37.748
+5V on Internal Plane 2 (split plane): 121.448,83.9 121.456,83.835 121.482,83.774 121.522,83.722 121.574,83.682 121.635,83.656 121.7,83.648 143.696,83.648 151.748,75.596 151.748,30.752 137.252,30.752 137.252,38 137.244,38.065 137.218,38.126 137.178,38.178 137.129,38.216 137.129,67.3 137.12,67.35 137.092,67.392 137.05,67.42 137,67.429 75.5,67.429 75.45,67.42 75.408,67.392 75.38,67.35 75.371,67.3 75.38,67.25 75.381,67.25 75.38,67.25 75.371,67.2 75.371,62.129 41.5,62.129 41.45,62.12 41.408,62.092 41.38,62.05 41.371,62 41.371,50.729 35,50.729 34.95,50.72 34.908,50.692 34.88,50.65 34.871,50.6 34.871,39.429 27.929,39.429 27.929,50.6 27.92,50.65 27.892,50.692 27.85,50.72 27.8,50.729 0.383,50.729 0.383,94.617 121.448,94.617
+4V on Internal Plane 2 (split plane): 75.371,3.129 61.629,3.129 61.629,26.5 61.62,26.55 61.592,26.592 61.55,26.62 61.5,26.629 27.929,26.629 27.929,34.5 27.929,39.171 35,39.171 35.05,39.18 35.092,39.208 35.12,39.25 35.129,39.3 35.129,50.471 41.5,50.471 41.55,50.48 41.592,50.508 41.62,50.55 41.629,50.6 41.629,61.871 75.371,61.871
+3.3V on Internal Plane 2 (split plane): 110.371,31.5 110.38,31.45 110.408,31.408 110.45,31.38 110.5,31.371 123.284,31.371 123.322,31.322 123.374,31.282 123.435,31.256 123.5,31.248 127.748,31.248 127.748,5.383 106.127,5.383 106.028,5.374 105.932,5.345 105.844,5.297 105.766,5.234 105.703,5.157 105.656,5.068 105.627,4.973 105.617,4.873 105.617,0.383 0.383,0.383 0.383,50.471 27.671,50.471 27.671,34.5 27.671,26.5 27.68,26.45 27.708,26.408 27.75,26.38 27.8,26.371 61.371,26.371 61.371,3 61.38,2.95 61.408,2.908 61.45,2.88 61.5,2.871 75.5,2.871 75.55,2.88 75.592,2.908 75.62,2.95 75.629,3 75.629,62 75.629,67.171 110.371,67.171

## Keep-outs
Keep-Out Layer:
  lines w0.254: 50,95 115,95 144,95 156,95 156,0 146,0 146,5 107,5 106,5 106,0 8,0 0,0 0,95 36.8,95 50.1,95

## Other copper
Bottom Layer:
  pour cut-out: 58.3,18.2 60.3,18.2 60.3,15.4 60.7,15.4 60.7,9.5 57.8,9.5 57.8,15.4 58.3,15.4
Internal Plane 2 (plane layer: these items are gaps in the copper):
  lines w0.254: -0.127,50.6 27.8,50.6 27.8,34.5 27.8,26.5 61.5,26.5 61.5,3 75.5,3 75.5,62 ; 27.8,39.3 35,39.3 35,50.6 41.5,50.6 41.5,62 75.5,62 ; 75.5,67.2 75.5,62 ; 75.5,67.3 110.5,67.3 ; 121.7,95.028 121.7,86.1 121.7,83.9 143.8,83.9 152,75.7 152,30.5 137,30.5 137,38 ; 123.5,31.5 123.5,38 137,38 ; 128,4.873 128,31.5 110.5,31.5 110.5,67.3 ; 110.5,67.3 137,67.3 137,38
  lines w0.5: 121.7,95.028 121.7,83.9 143.8,83.9 152,75.7 152,30.5 145.845,30.5 ; 128,4.873 128,31.5 123.5,31.5 123.5,38 137,38 137,30.5 145.845,30.5 ; 145.873,30.473 145.845,30.5
  lines w0.508: 145.873,30.473 145.873,13.5 156.1,13.5 ; 156.027,14.638 156.027,15

## Silkscreen, mask and mechanical layers (free items; w line width, h text height)
Top Overlay:
  text "GSM VOICE" at 61.4,85.8 h0.8
  text "COMM" at 82.7,85.8 h0.8
  text "ETHERNET" at 97,85.8 h0.8
  text "M1-2" at 9.5,82.1 h0.8
  text "M1-1" at 100.8,65 h0.8
  text "SD" at 140.2,59.1 h0.8
  text "REC" at 142.6,59.1 h0.8
  text "RUN" at 145.8,59.1 h0.8
  text "PWR" at 148.9,59.1 h0.8
  text "VM52-TYPE2-03" at 4.5,52.1 h1.5 r90
  text "VIDEO OUT" at 110,49.4 h0.8
  text "CONSOLE" at 1.6,27.4 h0.8
  text "USB" at 5,8.9 h0.8
Mechanical 1:
  circle w0.013: c146.75,80.75 r1
  circle w0.013: c112.25,80.75 r1
  circle w0.013: c152.5,5 r1.6
  circle w0.013: c152.5,90 r1.6
  circle w0.013: c3.5,5 r1.6
  circle w0.013: c3.5,90 r1.6
  circle w0.013: c18,7 r1.6
  circle w0.013: c99,7 r1.6
  circle w0.013: c99,78 r1.6
  circle w0.013: c18,78 r1.6
  lines w0.013: 8,0 8,83 65,83 ; 8,11 20.441,11 20.441,74 8,74 ; 93,83 107,83 107,5 ; 107,11 94.559,11 94.559,74 107,74 ; 115,83.5 109.5,83.5 109.5,78 115,78 ; 144,83.5 149.5,83.5 149.5,78 144,78 ; 115,78 115,100 144,100 144,78 ; 115,78 144,78 ; 65,62 65,90 93,90 93,62 65,62

## Text inside footprints (layer, text, board x,y; h text height)
J10: Top Overlay "2" at 112.2,61.3 h0.8 r90; Top Overlay "1" at 114.808,61.468 h0.8 r90; Top Overlay "9" at 114.808,75.184 h0.8 r90; Top Overlay "10" at 112.268,75.184 h0.8 r90